# Altium PCB NanoFury16.PcbDoc
Units mm, origin at the board's own origin, x right, y up, seen from the top; angles counter-clockwise.
Board outline 45 x 23 mm, 2 copper layers (Top Layer, Bottom Layer); 44 components, 22 nets, 168 pads, 123 vias.
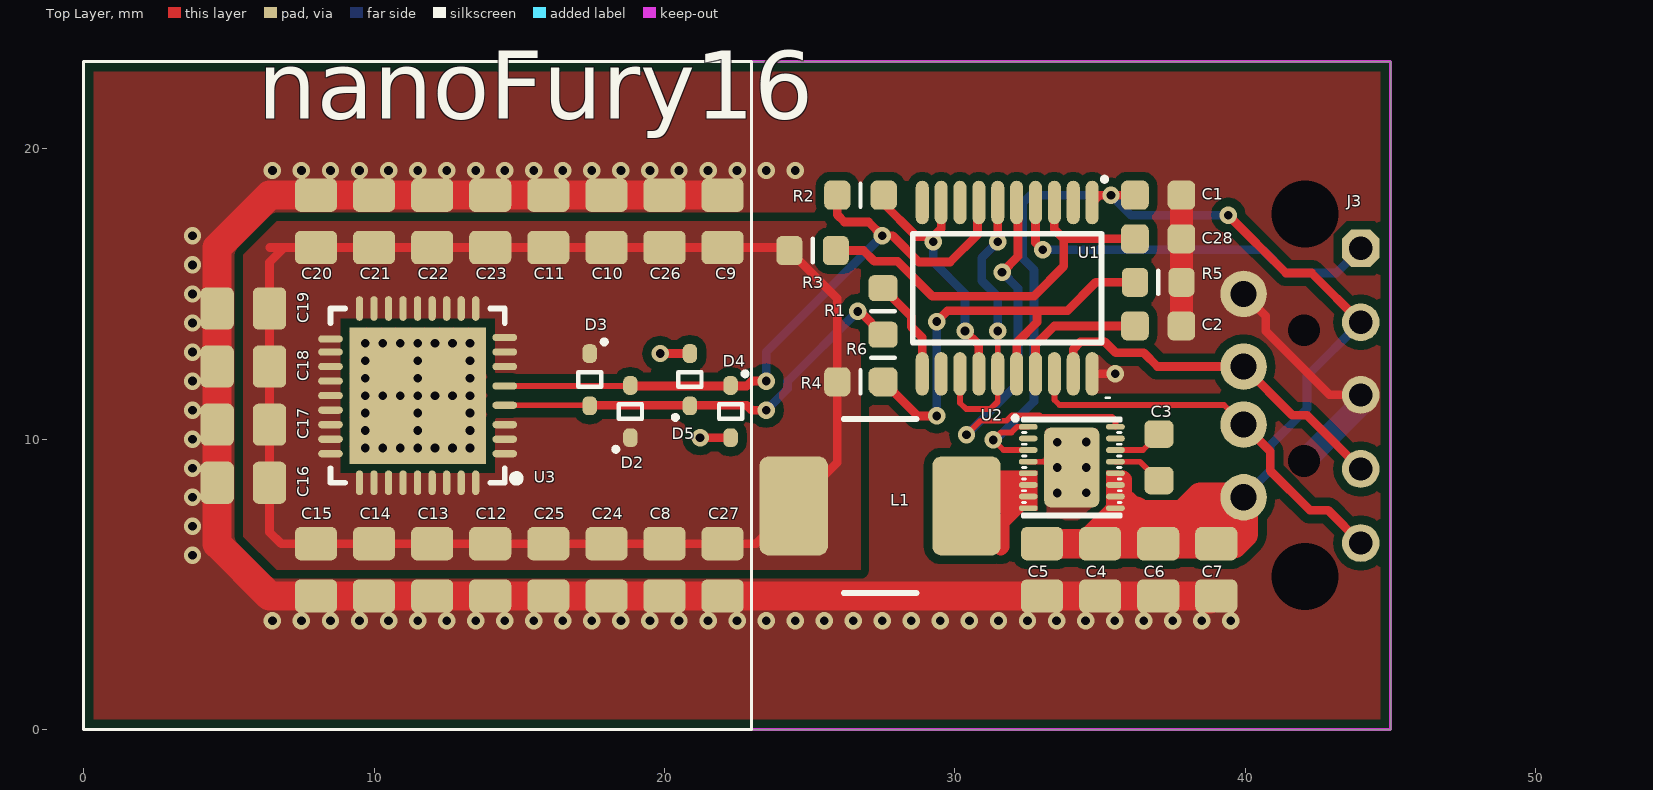
[diagram p0: Top Layer view]
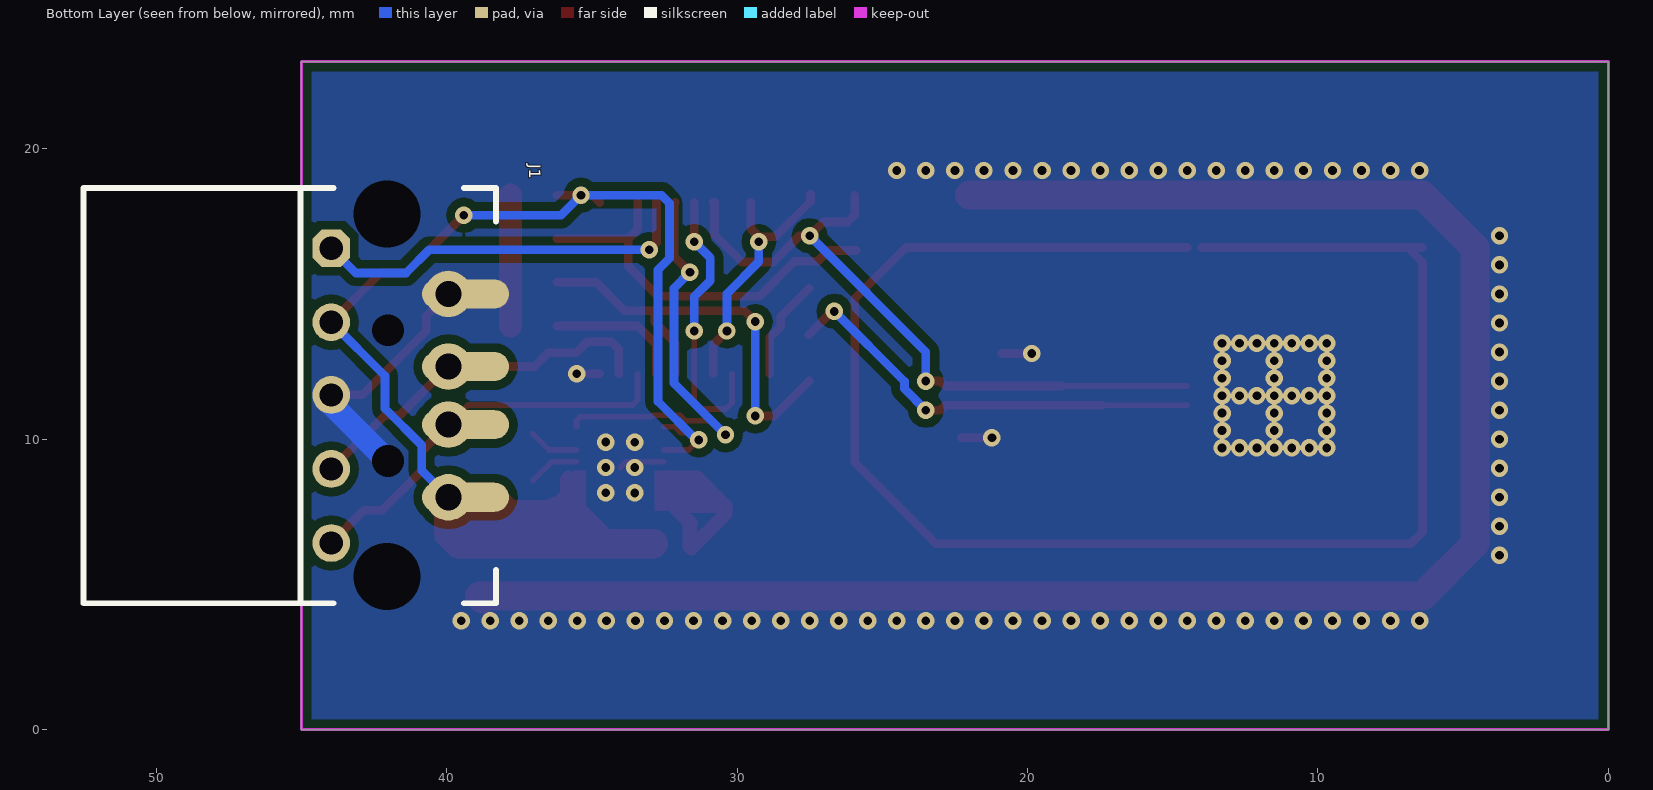
[diagram p1: Bottom Layer view, seen from below]
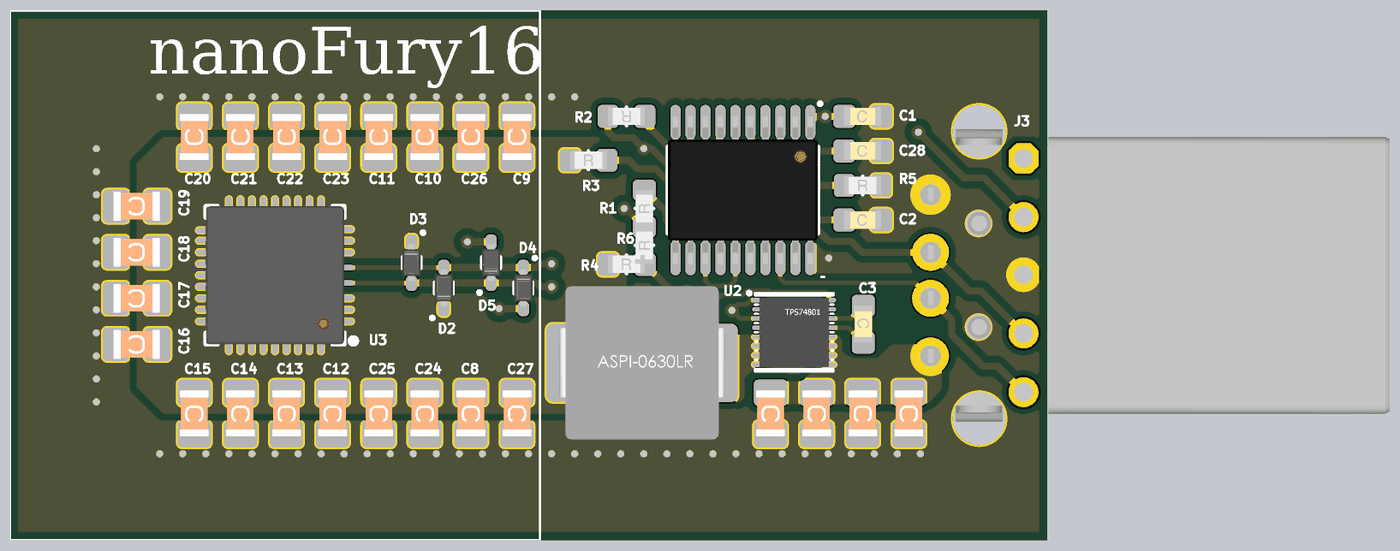
[diagram p2: 3D render of the assembled board from above, using the file's embedded part models]

## Layer stack, top to bottom
Top Solder: solder mask 0.0102, Solder Resist, Dk 3.5
Top Layer: signal copper 0.0356
Dielectric 1: dielectric 0.32, FR-4, Dk 4.8
Bottom Layer: signal copper 0.0356
Bottom Solder: solder mask 0.0102, Solder Resist, Dk 3.5

## Board outline
0,0 45,0 45,23 0,23

## Design rules (kind name [scope] priority, off if disabled: settings)
Clearance Clearance_110V_Keepout [InNetClass('110V') vs OnLayer('Keep-Out Layer')] p1 off: gap=0.3
Clearance Clearance_Q1Q2Q3 [(InComponent('Q1') OR InComponent('Q2') OR InComponent('Q3')) vs (InComponent('Q1') OR InComponent('Q2') OR InComponent('Q3'))] p2 off: gap=1
Clearance Clearance_110V_NoNet [InNetClass('110V') vs InNet('No Net')] p3 off: gap=0.5
Clearance Clearance_220V_110V [InNetClass('220V') vs InNetClass('110V')] p4 off: gap=1
Clearance Clearance_240VAC_220V [InNet('240VAC') vs InNetClass('220V')] p5 off: gap=1
Clearance Clearance_Poly [All vs InPolygon] p6: gap=0.3
Clearance Clearance_TrackAll [All vs IsTrack] p7 off: gap=0.2
Clearance Clearance_TrackU4 [InComponent('U4') vs IsTrack] p8 off: gap=0.25
Clearance Clearance_220V [InNetClass('220V')] p9 off: gap=2
Clearance Clearance_110V [InNetClass('110V')] p10 off: gap=1
Clearance [All] p11: gap=0.2
ComponentClearance [All] p1 off: gap=0.254 collisioncheckmode=3 verticalgap=0.254 showdistances=FALSE
Height [All] p1 off: minheight=0 maxheight=25.4 prefheight=12.7
PlaneClearance [All] p1: clearance=0.3
PlaneConnect [All] p1: planeconnectstyle=Direct reliefexpansion=0.508 reliefentries=4 reliefconductorwidth=0.254 reliefairgap=0.254
PolygonConnect [All] p1: connectstyle=Direct reliefconductorwidth=0.254 reliefentries=4 polygonreliefangle="90 Angle" airgapwidth=0.254
PolygonConnect PolygonConnect_Relief [All vs InComponentClass('ReliefConnect')] p2: connectstyle=Relief reliefconductorwidth=0.25 reliefentries=4 polygonreliefangle="90 Angle" airgapwidth=0.25
RoomDefinition NanoFury16 [InComponentClass('NanoFury16')] p1: confinementstyle=ConfineIn formatcopy=TRUE lockcomponents=FALSE outline 0,0 45,0 45,23 0,23
RoutingVias [All] p1: holewidth=0.711 width=1.27 viastyle="Through Hole" minholewidth=0.711 minwidth=1.27 maxholewidth=0.711 maxwidth=1.27
SolderMaskExpansion [All] p1: expansion=0.102
UnpouredPolygon [All] p1: allowunpoured=FALSE
Width [All] p1: maxlimit=5 minlimit=0.2 preferedwidth=0.5
25 further rules are at their usual default settings.

## Components (designator, comment, footprint, x,y, rotation, side; value= is the part's Value field where it differs from the comment)
C1 "100nF" SMD_0603_CAPC1608X95N 37,18.4 r0 top
C2 "1uF" SMD_0603_CAPC1608X95N 37,13.9 r0 top
C3 "100nF" SMD_0603_CAPC1608X95N 37.025,9.375 r270 top
C4 "22uF" SMD_0805_CAPC2012X95N 35,5.5 r270 top
C5 "22uF" SMD_0805_CAPC2012X95N 33,5.5 r270 top
C6 "22uF" SMD_0805_CAPC2012X95N 37,5.5 r270 top
C7 "22uF" SMD_0805_CAPC2012X95N 39,5.5 r270 top
C8 "22uF" SMD_0805_CAPC2012X95N 20,5.5 r270 top
C9 "22uF" SMD_0805_CAPC2012X95N 22,17.5 r90 top
C10 "22uF" SMD_0805_CAPC2012X95N 18,17.5 r90 top
C11 "22uF" SMD_0805_CAPC2012X95N 16,17.5 r90 top
C12 "22uF" SMD_0805_CAPC2012X95N 14,5.5 r270 top
C13 "22uF" SMD_0805_CAPC2012X95N 12,5.5 r270 top
C14 "22uF" SMD_0805_CAPC2012X95N 10,5.5 r270 top
C15 "22uF" SMD_0805_CAPC2012X95N 8,5.5 r270 top
C16 "22uF" SMD_0805_CAPC2012X95N 5.5,8.5 r180 top
C17 "22uF" SMD_0805_CAPC2012X95N 5.5,10.5 r180 top
C18 "22uF" SMD_0805_CAPC2012X95N 5.5,12.5 r180 top
C19 "22uF" SMD_0805_CAPC2012X95N 5.5,14.5 r180 top
C20 "22uF" SMD_0805_CAPC2012X95N 8,17.5 r90 top
C21 "22uF" SMD_0805_CAPC2012X95N 10,17.5 r90 top
C22 "22uF" SMD_0805_CAPC2012X95N 12,17.5 r90 top
C23 "22uF" SMD_0805_CAPC2012X95N 14,17.5 r90 top
C24 "22uF" SMD_0805_CAPC2012X95N 18,5.5 r270 top
C25 "22uF" SMD_0805_CAPC2012X95N 16,5.5 r270 top
C26 "22uF" SMD_0805_CAPC2012X95N 20,17.5 r90 top
C27 "22uF" SMD_0805_CAPC2012X95N 22,5.5 r270 top
C28 "100nF" SMD_0603_CAPC1608X95N 37,16.9 r0 top
D2 "D" SMD_SOD523_SOD1608X65N 18.825,10.95 r90 top
D3 "D" SMD_SOD523_SOD1608X65N 17.425,12.05 r270 top
D4 "D" SMD_SOD523_SOD1608X65N 22.275,10.95 r270 top
D5 "D" SMD_SOD523_SOD1608X65N 20.875,12.05 r90 top
J1 "USB_AB" "PTH_CON_USB_FCI-87520-0010B-LF - MALE SMD PTH" 45.4,11.5 r270 bottom locked
J3 "CON_5PINS" "SIP5 - PGM" 43.975,11.5 r270 top
L1 "470nH" SMD_INDM720X665X300 27.425,7.7 r0 top
R1 "1k" SMD_0603_RESC1608X55N 27.525,14.4 r90 top
R2 "1k" SMD_0603_RESC1608X55N 26.75,18.4 r180 top
R3 "1k" SMD_0603_RESC1608X55N 25.1,16.496 r0 top
R4 "1k" SMD_0603_RESC1608X55N 26.75,11.975 r0 top
R5 "1k" SMD_0603_RESC1608X55N 37,15.4 r0 top
R6 "0R N/A" SMD_0603_RESC1608X55N 27.525,12.8 r90 top
U1 "PIC16F1459" SMD_SOP65P640X110-20N 31.8,15.2 r270 top
U2 "CSD95379Q3M" "SMD_SON50P340X340X80-21N - VSON10" 34.025,9.025 r0 top
U3 "IC_BITFURY16" SMD_QFN65P600X600X100-36AN 11.5,11.5 r0 top

## Footprints (in the part's own frame and the unit in brackets; to place one, negate y for a bottom-side part, rotate by r counter-clockwise, add the part's x,y. Pads: shape width x height; smd on the part's side, far side on the other; paste and mask are expansions set on the pad)
"PTH_CON_USB_FCI-87520-0010B-LF - MALE SMD PTH" [mm]
  round 1.6 hole 0.9 mask+0.075: 1(-3.5,5.46) 2(-1,5.46) 3(1,5.46) 4(3.5,5.46)
  oval 1x3 smd mask+0.075: 1(-3.5,6.05) 2(-1,6.05) 3(1,6.05) 4(3.5,6.05)
  round 1 hole 2.3 unplated mask+0.725: 5(-6.25,3.35) 6(6.225,3.35)
  round 1 hole 1.1 unplated mask+0.1: 7(-2.25,3.375) 8(2.25,3.375)
  silkscreen extent -7.15,-7.1 7.15,7.1, body extent -6.35,-14.45 6.35,6.83, height 3.07
"SIP5 - PGM" [mm]
  oct 1.3x1.3 hole 0.8: 1(-5.075,0)
  round 1.3 hole 0.8: 2(-2.525,0) 3(-0.025,0) 4(2.525,0) 5(5.075,0)
SMD_0603_CAPC1608X95N [mm]
  rrect42% 0.95x1 smd mask+0.075: 1(-0.8,0) 2(0.8,0)
  body extent -0.8,-0.4 0.8,0.4, height 0.95
SMD_0603_RESC1608X55N [mm]
  rrect44% 0.9x1 smd mask+0.075: 1(-0.8,0) 2(0.8,0)
  silkscreen extent 0,-0.4 0,0.4, body extent -0.8,-0.4 0.8,0.4, height 0.55
SMD_0805_CAPC2012X95N [mm]
  rrect35% 1.15x1.45 smd mask+0.075: 1(-0.9,0) 2(0.9,0)
  body extent -1,-0.62 1,0.63, height 1.25
SMD_INDM720X665X300 [mm] "ASPI-0630LR"
  rrect25% 2.35x3.4 smd mask+0.075: 1(-2.975,0) 2(2.975,0)
  silkscreen extent -1.25,-3 1.25,3, body extent -3.6,-3.32 3.6,3.33, height 3
SMD_QFN65P600X600X100-36AN [mm]
  oval 0.85x0.25 smd mask+0.05: 1(-3,1.95) 2(-3,1.5) 3(-3,1) 4(-3,0.5) 5(-3,0) 6(-3,-0.5) 7(-3,-1) 8(-3,-1.5) 9(-3,-2) 19(3,-2) 20(3,-1.5) 21(3,-1) 22(3,-0.333) 23(3,0.333) 24(3,1) 25(3,1.5) 26(3,2)
  oval 0.25x0.85 smd mask+0.05: 10(-2,-3) 11(-1.5,-3) 12(-1,-3) 13(-0.5,-3) 14(0,-3) 15(0.5,-3) 16(1,-3) 17(1.5,-3) 18(2,-3) 27(2,3) 28(1.5,3) 29(1,3) 30(0.5,3) 31(0,3) 32(-0.5,3) 33(-1,3) 34(-1.5,3) 35(-2,3)
  rect 4.7x4.7 smd paste-0.95 mask+0.05: 36(0,0)
  silkscreen extent -3,-3 3.53,3, body extent -3.01,-3.01 3,3, height 1
SMD_SOD523_SOD1608X65N [mm]
  rrect80% 0.65x0.5 smd mask+0.075: 1(-0.9,0) 2(0.9,0)
  silkscreen extent -1.45,-0.4 0.25,0.65, body extent -0.8,-0.4 0.8,0.4, height 0.7
"SMD_SON50P340X340X80-21N - VSON10" [mm]
  oval 0.65x0.2 smd mask+0.05: 1(-1.5,1.4) 2(-1.5,1) 3(-1.5,0.6) 4(-1.5,0.2) 5(-1.5,-0.2) 6(-1.5,-0.6) 7(-1.5,-1) 8(-1.5,-1.4) 9(1.5,-1.4) 10(1.5,-1) 11(1.5,-0.6) 12(1.5,-0.2) 13(1.5,0.2) 14(1.5,0.6) 15(1.5,1) 16(1.5,1.4)
  rrect24% 1.9x2.75 smd paste-0.35 mask+0.05: 17(0,0)
  Top Layer region: -1.175,-0.1 -1.625,-0.1 -1.625,-1.5 -1.175,-1.5
  Top Layer region: 1.175,-1.5 1.625,-1.5 1.625,-0.1 1.175,-0.1
  silkscreen extent -2.1,-1.7 1.7,2.4, body extent -1.5,-1.5 1.5,1.5, height 0.95
SMD_SOP65P640X110-20N [mm]
  oval 1.5x0.45 smd mask+0.05: 1(-2.95,2.925) 2(-2.95,2.275) 3(-2.95,1.625) 4(-2.95,0.975) 5(-2.95,0.325) 6(-2.95,-0.325) 7(-2.95,-0.975) 8(-2.95,-1.625) 9(-2.95,-2.275) 10(-2.95,-2.925) 11(2.95,-2.925) 12(2.95,-2.275) 13(2.95,-1.625) 14(2.95,-0.975) 15(2.95,-0.325) 16(2.95,0.325) 17(2.95,0.975) 18(2.95,1.625) 19(2.95,2.275) 20(2.95,2.925)
  silkscreen extent -3.9,-3.25 1.88,3.5, body extent -3.2,-3.25 3.2,3.25, height 1.2

## Part data
C1 C2 C3 C4 C5 C6 C7 C8 C9 C10 C11 C12 C13 C14 C15 C16 C17 C18 C19 C20 C21 C22 C23 C24 C25 C26 C27 C28: library part C
J1: library part CON_USB_AB
L1: library part L
R1 R2 R3 R4 R5 R6: library part R
U1: library part IC_PIC16F1459
U2: library part IC_CSD95379Q3M, "Texas Instrumendts Buck Boost DC-DC"
U3: "BitFury 2016 16 nm"

## Via types
v1: diameter 0.6, hole 0.3, Top Layer to Bottom Layer, tented top, 46 vias
v2: diameter 0.6/0.6 (per signal layer), hole 0.3, Top Layer to Bottom Layer, 33 vias
v3: diameter 0.6, hole 0.3, Top Layer to Bottom Layer, tented both sides, 21 vias
v4: diameter 0.6/0.6 (per signal layer), hole 0.3, Top Layer to Bottom Layer, tented both sides, 17 vias
v5: diameter 0.6/0.6 (per signal layer), hole 0.3, Top Layer to Bottom Layer, tented bottom, 6 vias

## Nets (pads, with @x,y where several pads share a name; then routed paths per layer and width w, separated by ;. In a path a pad name is that pad's centre, name@x,y a point inside that pad or via, vN(x,y) a via of type N, cw(c..) or ccw(c..) an arc to the next point about the centre after c; other vN are vias at no path point)
0.4V: C8.1 C9.1 C10.1 C11.1 C12.1 C13.1 C14.1 C15.1 C16.1 C17.1 C18.1 C19.1 C20.1 C21.1 C22.1 C23.1 C24.1 C25.1 C26.1 C27.1 D2.1 D3.1 L1.1 R3.1 R4.1 U3.1 U3.2 U3.3 U3.4 U3.5 U3.6 U3.7 U3.8 U3.9 U3.10 U3.11 U3.12 U3.13 U3.14 U3.15 U3.16 U3.17 U3.18 U3.19 U3.20 U3.21 U3.24 U3.25 U3.26 U3.27 U3.28 U3.29 U3.30 U3.31 U3.32 U3.33 U3.34 U3.35 | length 56.3
  Top Layer w0.3: 6.404,16.6 C20.1 C21.1 C22.1 C23.1 ; 6.904,16.6 6.4,16.096 C19.1 C18.1 C17.1 C16.1 6.4,6.8 6.8,6.4 8.5,6.4 10.5,6.4 12.5,6.4 14.5,6.4 16.5,6.4 18.5,6.4 20.5,6.4 23.15,6.4 L1.1 25.95,9.2 R4.1 25.95,14.846 R3.1 24.196,16.6 C23.1@14.5,16.6
5.0V: C1.1 C4.1 C5.1 C6.1 C7.1 J1.4 J3.2 U1.1 U2.1 U2.3 U2.9 U2.10 U2.11 U2.12 | length 58.4
  Top Layer w0.2: U2.3 31.675,9.625 v3(31.325,9.975) 31.585,10.235 31.945,10.235 32.134,10.425 U2.1
  Top Layer w0.3: U1.1 34.975,18.4 v3(35.375,18.4) C1.1 ; v3(39.412,17.712) 41.4,15.725 42.275,15.725 J3.2
  Top Layer w0.5: C4.1@34.875,6.4 35.525,7.05 35.525,7.344 U2.9 U2.10 U2.11 35.55,8.425 35.8,8.675 35.85,8.625 35.85,7.75
  Top Layer w1: C5.1@32.875,6.4 C4.1@34.875,6.4 ; C4.1@34.875,6.4 36.075,6.4 ; C4.1@34.875,6.4 34.875,6.694 35.525,7.344 35.675,7.344 35.675,7.575 35.85,7.75 36.075,7.525 ; 36.075,6.4 C7.1@38.875,6.4 ; 36.075,6.4 36.075,7.525 ; 36.075,7.525 36.227,7.525 36.352,7.4 37.85,7.4 ; 37.85,7.4 38.45,8 J1.4@39.94,8 ; 37.85,7.4 39.34,7.4 ; C7.1@38.875,6.4 38.875,6.935 39.34,7.4 ; C7.1@38.875,6.4 39.6,6.4 39.94,6.74 J1.4@39.94,8 ; 39.34,7.4 J1.4@39.94,8
  Bottom Layer w0.3: v3@31.425,10 32.725,11.3 32.725,15.835 32.325,16.235 32.325,18.125 32.6,18.4 v3(35.375,18.4) 36.062,17.712 v3(39.412,17.712) ; J1.4@39.05,8 39.35,8 39.94,8 40.86,8.92 40.86,9.794 42.125,11.059 42.125,12.175 J3.2
BOOT: C3.1 U2.14 | length 1.7
  Top Layer w0.2: U2.14 36.475,9.625 C3.1
BOOT_R: C3.2 U2.13 | length 1.8
  Top Layer w0.2: U2.13 36.375,9.225 C3.2
D+: J1.2 J3.4 U1.19 | length 12.7
  Top Layer w0.3: U1.19 34.075,13.1 34.325,13.35 35.164,13.35 35.539,12.975 36.5,12.975 36.975,12.5 39.94,12.5 41.615,10.825 42.125,10.825 J3.4
D-: J1.3 J3.5 U1.18 | length 13.9
  Top Layer w0.2: U1.18 33.425,11.35 33.6,11.175 39.265,11.175 J1.3@39.94,10.5
  Top Layer w0.3: J1.3@39.94,10.5 40.86,9.58 40.86,8.915 42.225,7.55 42.85,7.55 J3.5
GND: C1.2 C2.2 C4.2 C5.2 C6.2 C7.2 C8.2 C9.2 C10.2 C11.2 C12.2 C13.2 C14.2 C15.2 C16.2 C17.2 C18.2 C19.2 C20.2 C21.2 C22.2 C23.2 C24.2 C25.2 C26.2 C27.2 C28.2 D4.2 D5.2 J1.1 J1.5 J1.6 J1.7 J1.8 J3.3 R5.2 U1.20 U2.4 U2.17 U3.36 | length 81.7
  Top Layer w0.2: U2.4 33.825,9.225 U2.17
  Top Layer w0.3: v3(19.85,12.95) D5.2 ; v3(21.225,10.05) D4.2 ; U1.20 v3(35.525,12.25) ; J1.1@39.94,15 40.7,14.24 40.7,13.725 42.9,11.525 J3.3
  Top Layer w0.8: C2.2 R5.2 C28.2 C1.2
  Top Layer w1: C20.2 C11.2 C10.2 C26.2 C9.2 ; C20.2@8.5,18.4 6.4,18.4 4.6,16.6 C19.2 C18.2 C17.2 C16.2 4.6,6.4 6.4,4.6 C7.2@38.775,4.6 ; C7.2@38.775,4.5 C7.2@38.875,4.6
  Bottom Layer w0.8: J1.8 43.975,11.2 J3.3
  other v1: 6.5,3.75 7.5,3.75 8.5,3.75 9.5,3.75 10.5,3.75 11.5,3.75 12.5,3.75 13.5,3.75 14.5,3.75 15.5,3.75 16.5,3.75 17.5,3.75 18.5,3.75 19.5,3.75 20.5,3.75 21.5,3.75 22.5,3.75 3.75,6 3.75,7 3.75,8 3.75,9 3.75,10 3.75,11 3.75,12 3.75,13 3.75,14 3.75,15 3.75,16 3.75,17 6.5,19.25 7.5,19.25 8.5,19.25 9.5,19.25 10.5,19.25 11.5,19.25 12.5,19.25 13.5,19.25 14.5,19.25 15.5,19.25 16.5,19.25 17.5,19.25 18.5,19.25 19.5,19.25 20.5,19.25 21.5,19.25 22.5,19.25
  other v2: 9.7,9.7 10.3,9.7 10.9,9.7 11.5,9.7 12.1,9.7 12.7,9.7 13.3,9.7 9.7,10.3 11.5,10.3 13.3,10.3 9.7,10.9 11.5,10.9 13.3,10.9 9.7,11.5 10.3,11.5 10.9,11.5 11.5,11.5 12.1,11.5 12.7,11.5 13.3,11.5 9.7,12.1 11.5,12.1 13.3,12.1 9.7,12.7 11.5,12.7 13.3,12.7 9.7,13.3 10.3,13.3 10.9,13.3 11.5,13.3 12.1,13.3 12.7,13.3 13.3,13.3
  other v3: 23.5,19.25 24.5,19.25
  other v4: 23.5,3.75 24.5,3.75 25.5,3.75 26.5,3.75 27.5,3.75 28.5,3.75 29.5,3.75 30.5,3.75 31.5,3.75 32.5,3.75 33.5,3.75 34.5,3.75 35.5,3.75 36.5,3.75 37.5,3.75 38.5,3.75 39.5,3.75
  other v5: 33.525,8.149 34.525,8.154 33.525,9.025 34.525,9.025 33.525,9.896 34.525,9.901
MCLR: J3.1 U1.4 | length 13.4
  Top Layer w0.3: U1.4 32.775,16.775 v3(33.025,16.525)
  Bottom Layer w0.3: v3(33.025,16.525) 40.6,16.525 41.4,15.725 43.125,15.725 J3.1
PGD/VREF: R4.2 R5.1 R6.1 U1.16 | length 15.5
  Top Layer w0.3: R6.1 28.725,10.8 v3(29.375,10.8) ; v3(29.371,14.05) 29.746,14.425 32.825,14.425 ; U1.16 32.125,13.325 32.825,14.025 32.825,14.425 ; R5.1 34.849,15.4 33.874,14.425 32.825,14.425
  Bottom Layer w0.3: v3(29.371,14.05) 29.371,10.804 v3(29.375,10.8)
PWM1: U1.5 U2.16 | length 14.9
  Top Layer w0.2: v3(30.4,10.15) 30.885,10.635 31.779,10.635 31.969,10.825 32.916,10.825 32.966,10.775 35.4,10.775 35.525,10.65 U2.16
  Top Layer w0.3: v3(31.625,15.75) 32.175,16.3 32.175,18.1 U1.5
  Bottom Layer w0.3: v3(30.4,10.15) 32.175,11.925 32.175,15.2 v3(31.625,15.75)
PWM2: U1.8
RA5: U1.2
RB5: U1.12
RB7: U1.10
SCK: R1.2 U1.11 | length 3.5
  Top Layer w0.3: R1.2 28.5,14.225 28.5,13.875 28.875,13.5 U1.11
SCK0.4: D3.2 D5.1 R1.1 R6.2 U3.22 | length 15
  Top Layer w0.2: U3.22 D3.2@17.425,11.167
  Top Layer w0.3: D3.2@17.425,11.167 22.833,11.167 23,11 v3(23.5,11) ; v3(26.65,14.4) 26.725,14.4 R1.1
  Bottom Layer w0.3: v3(23.5,11) 24.238,11.738 24.238,11.987 v3(26.65,14.4)
SDA0.4: D2.2 D4.1 R2.2 U1.7 U3.23 | length 23.4
  Top Layer w0.2: U3.23 D2.2@18.825,11.833
  Top Layer w0.3: D2.2@18.825,11.833 22.833,11.833 23,12 v3(23.5,12) ; R2.2 25.95,17.725 26.2,17.475 27.025,17.475 v3(27.5,17) 27.855,17 28.755,16.1 29.833,16.1 30.775,17.042 30.775,18.15 U1.7
  Bottom Layer w0.3: v3(23.5,12) 23.5,13 v3(27.5,17)
SDI: U1.6 U1.13 U1.15 | length 9.8
  Top Layer w0.2: U1.13 30.175,11.25 30.39,11.035 31.218,11.035 31.475,11.292 U1.15 v3(31.475,13.725)
  Top Layer w0.3: v3(31.475,16.8) U1.6
  Bottom Layer w0.3: v3(31.475,13.725) 31.475,14.91 30.925,15.46 30.925,16.25 v3(31.475,16.8)
SDO: R2.1 U1.9 U1.14 | length 9.2
  Top Layer w0.3: R2.1@27.475,18.425 27.475,18.187 28.687,16.975 v3@29.25,16.975 ; v3(29.25,16.8) v3@29.25,16.975 ; U1.9 29.525,17.25 v3@29.25,16.975 ; v3(30.35,13.725) 30.825,13.25 U1.14
  Bottom Layer w0.3: v3(29.25,16.8) 29.25,16.11 30.35,15.01 v3(30.35,13.725)
SW: L1.2 U2.5 U2.6 U2.7 U2.8 | length 12
  Top Layer w0.5: 32.35,8.675 31.375,8.675 L1.2@31.125,8.425 ; 32.525,7.914 U2.7 ; L1.2 32.2,7.7 ; L1.2 L1.2@30.725,8.025 ; L1.2 30.4,7.425 31.575,6.25 31.625,6.3 31.625,7.075 31.6,7.1 32.2,7.7 ; L1.2@30.725,8.025 U2.7 ; L1.2@30.725,8.025 L1.2@31.125,8.425 ; L1.2@31.125,8.425 U2.6 U2.7 ; 32.2,7.7 U2.7
VOLT_MEAS: C28.1 R3.2 U1.3 | length 13.7
  Top Layer w0.3: R3.2 26.852,16.496 27.223,16.125 28.023,16.125 29.223,14.925 32.725,14.925 33.75,15.95 33.75,16.9 ; U1.3 33.425,17.225 33.75,16.9 ; C28.1 33.75,16.9
VUSB3V3: C2.1 U1.17 | length 4.7
  Top Layer w0.3: U1.17 32.775,13.25 33.425,13.9 C2.1
pads on no net: U2.2 U2.15

## Polygon pours and split planes (outlines as drawn)
GND on Bottom Layer "GNDBOTTOM" (solid, pour order 6): 0,0 45,0 45,23 0,23
GND on Top Layer "GNDTOP" (solid, remove dead copper, pour order 8): 0,0 45,0 45,23 0,23
0.4V on Top Layer "0.4TOP" (solid, remove dead copper, pour order 5): 5.5,5.5 26.75,5.5 26.75,17.5 5.5,17.5
no net on Bottom Solder "Radiator" (solid): 0,0 22.875,0 22.875,23 0,23

## Keep-outs
Keep-Out Layer:
  the board outline again, w0.1

## Silkscreen, mask and mechanical layers (free items; w line width, h text height)
Top Overlay:
  lines w0.1: 0,0 0,23 ; 0,0 0,23 ; 0,0 23,0 23,23 0,23 ; 0,0 0,0 ; 0,23 0,23 ; 22.5,23 22.5,23
  text "nanoFury16" at 6,20.25 h4

## Text inside footprints (layer, text, board x,y; h text height)
J1: Mechanical 3 "4" at 41.14,8.079 h0.5 r90; Mechanical 3 "1" at 41.19,15.06 h0.5 r90; Mechanical 3 "1" at 41.09,15.06 h0.5 r90; Mechanical 3 "4" at 41.14,8.079 h0.5 r90